# Altium PCB Widora-NEO-SEER.PcbDoc (part 2 of 2)
Units mil, origin at the board's own origin, x right, y up, seen from the top; angles counter-clockwise.
Board outline 3000 x 1400 mil, 4 copper layers (Top Layer, GND, PWR, Bottom Layer), stack 84.8 mil thick; 153 components, 144 nets, 699 pads, 452 vias.
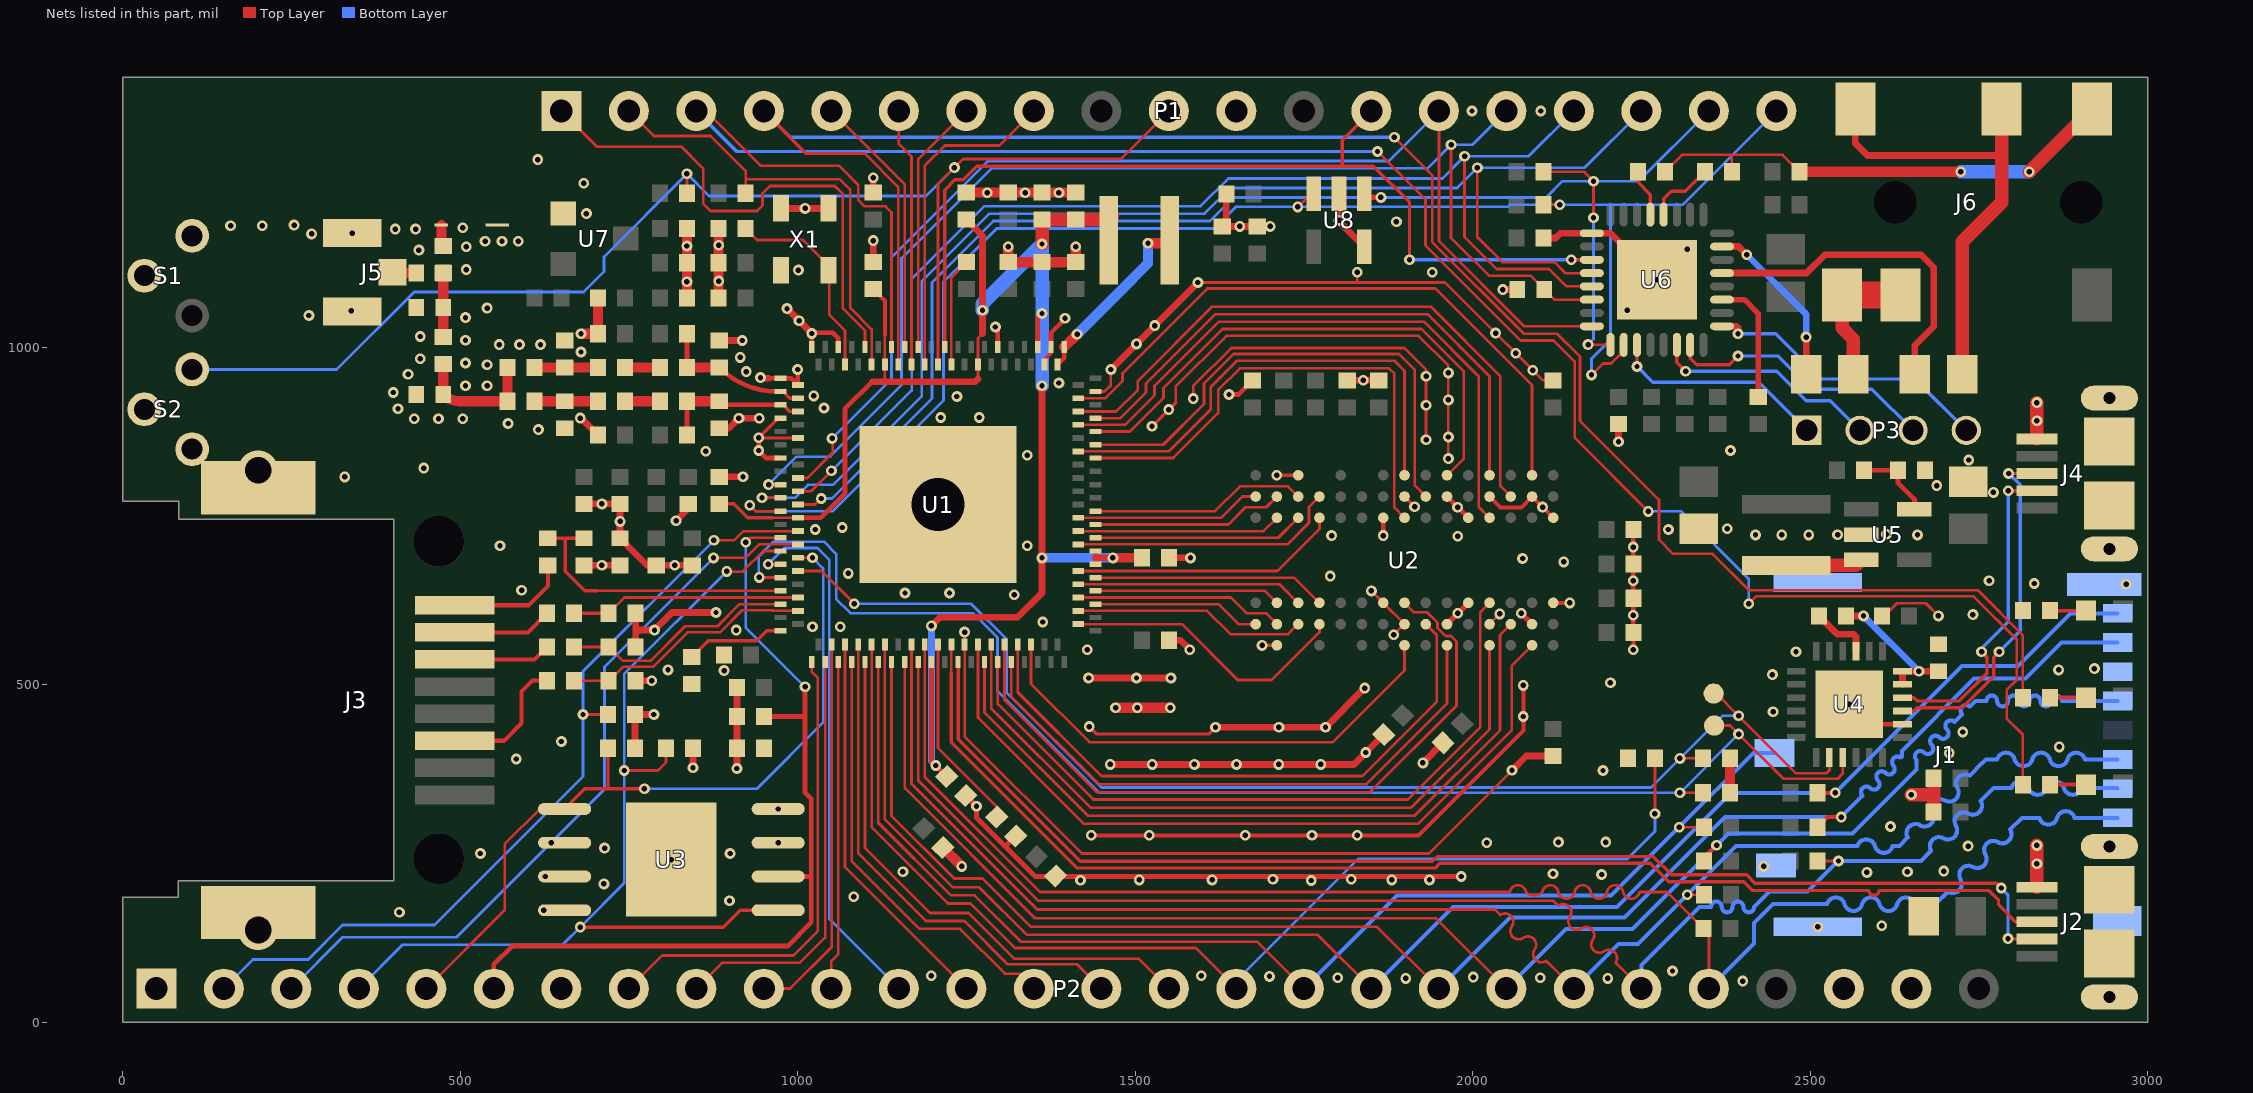
[diagram p4: the nets of this part, all layers, seen from the top]

## Via types
v1: diameter 16, hole 8, Top Layer to Bottom Layer, tented both sides, 447 vias
v2: diameter 59.06, hole 39.37, Top Layer to Bottom Layer, 2 vias
v3: diameter 118.11, hole 78.74, Top Layer to Bottom Layer, tented both sides, 2 vias
v4: diameter 98.43, hole 78.74, Top Layer to Bottom Layer, tented both sides, 1 vias

## Nets (pads, with @x,y where several pads share a name; then routed paths per layer and width w, separated by ;. In a path a pad name is that pad's centre, name@x,y a point inside that pad or via, vN(x,y) a via of type N, cw(c..) or ccw(c..) an arc to the next point about the centre after c; other vN are vias at no path point) (continued)
GND: A1.2 C1.2 C2.2 C3.1 C4.2 C5.2 C8.2 C10.1 C11.2 C12.2 C13.2 C14.1 C15.1 C16.2 C17.2 C18.2 C19.2 C20.2 C21.2 C23.2 C25.2 C26.2 C27.2 C28.2 C29.2 C31.2 C32.2 C33.2 C34.2 C35.2 C36.2 C37.2 C38.1 C39.2 C40.1 C41.1 C42.2 C43.2 C44.2 C45.2 C46.2 C47.2 C48.2 C49.1 C54.2 C55.2 C56.2 C57.2 C58.2 C59.2 C60.1 C61.1 C62.2 C63.2 C64.1 C65.2 C66.1 C69.1 C75.2 J1.6 J1.G1 J1.G2 J1.G3 J1.G4 J1.G5 J2.5 J2.6 J2.7 J2.8 J2.9 J3.9 J3.10 J4.5 J4.6 J4.7 J4.8 J4.9 J5.2 J5.3 L1.1 P1.11 P2.7 P2.26 P2.27 R3.1 R8.1 R10.1 R22.2 R26.2 R30.1 R34.1 R35.1 R37.1 R39.1 R41.2 S1.0 S1.2 S2.0 S2.1 U1.1 U1.2 U1.7 U1.10 U1.13 U1.63 U1.115 U1.120 U1.121 U1.128 U1.152 U1.156 U1.157 U2.A3 U2.A7 U2.B2 U2.B8 U2.D2 U2.D8 U2.E3 U2.E7 U2.F2 U2.F8 U2.H2 U2.H8 U2.J3 U2.J7 U2.N1 U2.P9 U3.4 U4.2 U4.25 U5.2 U6.9 U6.33 U7.1 U8.2 U8.5 X1.2 X1.3 X1.4 | length 9302.3
  Top Layer w4: v1@942.43,865.9 942.88,865.45 U1.10@1000.32,865.45 ; v1(1247.37,578) 1247.37,423.63 1421,250 1935,250 v1(2058.27,373.27) ; U1.115@1441.27,934.35 1454.62,934.35 1464,943.72 v1(1464,966.98) ; 1560,918 1560,942 1635,1017 1920,1017 1964,973 v1(1964,922) v1(1964,835) ; v1(1586,924) 1586,942.46 1642.54,999 1899,999 1931,967 v1(1931,863) ; v1(1592.92,1095.9) 1829,1095.9 ; v1(1829,1111) 1829,1095.9 ; v1(1850,639.06) 1867.5,621.55 U2.J7@1867.5,621.35 U2.H8@1899,589.86 v1@1881.48,572.34 ; U2.D8@2024.98,589.86 v1@2040.09,604.96 ; C29.2@2119,951 2104,951 v1(2063.82,991.18) v1(2034.01,1020.99) 1959.1,1095.9 1829,1095.9 ; C64.1@2606.37,602 2609.76,602 2628.56,620.8 2671.2,620.8 v1(2690,602)
  Top Layer w5: v1@942.43,866.19 U1.7@971.21,894.97 ; U1.121@1365.48,974.7 1365.48,981.48 1375.32,991.32 U1.120@1375.32,1000.29 ; v1(1432,438) 1443,427 1609,427 v1(1619,437) ; v1(1525,883) 1560,918 ; v1(1688,558.31) U2.P9@1710.02,558.36 ; v1@1709.78,810.33 U2.N1@1741.52,810.33 ; U2.H2@1899,778.83 U2.H2@1899,778.83 v1(1914,763.78)
  Top Layer w6: v1(1435,277) v1(1829,277) 1920,277 2075,432 v1(2075,453) v1(2075,499) ; U2.D2@2024.98,778.83 2040.96,762.81 2072,762.81 U2.B2@2087.98,778.83 U2.A3@2119.47,747.34 ; U2.A7@2119.47,621.35 v1(2143.7,621.35) ; v1(2238,552) C39.2@2238,577.43
  Top Layer w7: v1@942.43,866.19 v1(942.43,847) 953.51,835.92 U1.13@974.73,835.92 ; 956.97,954.03 990.48,954.03 U1.2@1000.32,944.19 1000.32,966.68 v1(1000,967) ; U1.7@971.21,894.97 U1.7@974.73,894.98 ; v1@1019.76,1021.66 1052.36,1021.66 1060.36,1013.66 U1.152@1060.36,1000.29 ; U1.156@1020.99,1000.29 v1(1020.99,1020.43) ; v1(1293,1030) 1296.58,1026.42 U1.128@1296.58,1000.29 ; U1.120@1375.32,1000.29 1375.32,1021.32 v1@1397,1043 ; v1(1639,930) 1653,930 C37.2@1674,951 ; v1(1867.5,721) U2.J3@1867.5,747.34 ; U2.F2@1961.99,778.83 U2.E3@1993.49,747.34 ; C39.2@2238,577.43 v1(2238,603) C34.2@2238,628.14 C27.2@2238,678.86 ; C27.2@2238,689.57 C27.2@2238,678.86 ; C28.2@2238,730 v1(2238,704) C27.2@2238,678.86 ; v1(2558,471) 2587.53,441.47 U4.2@2636.74,441.47
  Top Layer w8: C58.2@1247.14,337.86 v1(1265,320) 1265,303 1352,216 v1(1983,216) ; 1308.83,261.55 R22.2@1323.14,275.86 ; U2.F8@1961.99,589.86 U2.E7@1993.49,621.35 ; v1(2071.95,605.89) U2.B8@2087.98,589.86
  Top Layer w10: v1(678,895) 679.02,895 C2.2@704,870.02 ; v1(710,768.02) C19.2@683.5,768.02 C17.2@737,768.02 C49.1@737,717.02 777,677.02 C1.2@790.5,677.02 C55.2@844,677.02 ; v1(820,743) 838,761 C18.2@838,768.02 ; v1(845,377) R35.1@845,406 ; C4.2@878,1068.02 C4.2@883,1073.02 ; C60.1@884,808.02 v1(919.02,808.02) ; C8.2@884,880 898.03,880 v1(913,894.97) v1(943,894.97) ; C10.1@884,1010 v1(918,1010) ; v1(945,955) 945.97,954.03 956.97,954.03 ; X1.3@975.07,1205.69 X1.2@1045.93,1205.69 ; v1(984.19,1057.23) 1019.76,1021.66 v1(1020.99,1020.43) ; C61.1@1112,1126.02 v1(1112,1158) ; C56.2@1112,1229.02 v1(1112,1251) ; v1(1431,510) v1(1502,510) v1(1553,510) ; v1(1463,382) v1(1525.4,382) v1(1587.8,382) v1(1650.2,382) v1(1712.6,382) v1(1775,382) 1824,382 C25.2@1868.22,426.22 ; v1(1464,966.98) v1(1592.92,1095.9) ; C36.2@1550,566 1567,566 v1(1581,552) ; C59.2@1550,688 v1(1582,688) ; v1(1619,437) v1(1782,437) v1(1840,495) ; C54.2@1635,1179 v1(1655,1179) C32.2@1680.98,1179 v1(1699.98,1179) ; C54.2@1635,1185.02 C35.2@1635,1227 ; U8.2@1802,1227.37 1802,1186.03 U8.5@1839.4,1148.63 ; R3.1@1811,951.02 C31.2@1861,951.02 ; v1(1926.28,384.28) C23.2@1956.2,414.2 ; v1(2044.53,1085.47) R34.1@2066,1085.47 ; v1(2058.27,373.27) 2079.36,394.36 C26.2@2119,394.36 ; C69.1@2105,1162 2123,1162 2129.9,1168.9 U6.9@2176.54,1168.9 2204.1,1168.9 v1(2273,1100) ; v1(2216,860) R30.1@2216,886
  Top Layer w15: v1(679,1020) C3.1@704,1020.02 C16.2@704,1073.02 ; C11.2@836,1073.02 v1(836,1097) C21.2@836,1125.02 C20.2@836,1176.02 ; C4.2@883,1073.02 C5.2@883,1125.02 C15.1@883,1176.02 ; C43.2@1215.14,258.86 v1(1243,231) ; C75.2@1249.98,1229.02 C62.2@1312,1229.02 C57.2@1362,1229.02 C40.1@1412,1229 ; v1(1312,1149) C33.2@1312,1126.02 C41.1@1362,1126.02 C48.2@1412,1126.02 v1(1412,1149) ; v1(1471,466) v1(1503,466) v1(1552,466) ; R8.1@2381,340 R39.1@2381,391
  Top Layer w20: v1(2650,337) 2682,337 ; C44.2@2683,311.68 C45.2@2683,361.68 ; J2.5@2835.91,200.19 v1(2835.91,262.09) ; J4.5@2835.91,864.19 v1(2835.91,918.09)
  other v1: 2400,61 1901,65 2200,65 1800,66 2100,66 2001,67 1699,68 1198,69 1598,69 2296,76 2511.5,141.34 2606,143 410,163 624,166 899,180 1083,186 713,205 1418.97,210.5 1761,210 1506,211 1614,211 1880,211 1936,211 1704,212 1820,212 2191,219 2119,220 2584,222 1156,223 2644,223 2698,224 2431,231 2835.91,235 813,241 530,250 900,250 714,258 2734,261 2021,266 2127,267 2197,267 1521,277 1663,277 1762,277 2619,290 2193,373 583,390 2706,399 1841.74,399.74 2869,408 650,416 2726,430 1713,437 2445,460 2204,503 2444,515 891,521 808,522 2868,522 2921,524 2479,549 1429,552 1883,574.06 909,581 1022,586 1063,586 1363,593 2741,604 2040,605.06 1978,606.06 1321,633.22 1159,636 1225,636 591,640 2968,649 2832,650 2238,654 2765,654 1789,661.06 1075,665 818,677.02 2135,682 2074,687 559,706 1340,706 1978,720 1791,721 2419,722 2458,722 2498,722 2540.63,722.37 2659,722 2613.03,723 1026,730 2290,730 2377,731 1066,733 737,742 1977.74,763.09 2103.54,763.22 2771.43,785 2687.4,795 329,808 1709.72,810.28 446,821 2735,833 1340,840 864,846 2382,847 942.43,866 1964,867 616,878 571,887 2835.91,891 432,894 468,894 504,894 1212,896 1269,896 1549.67,907.67 408,909 1039,910 1931,914 1236,927 1024,928 401,933 508,943 540,943 1387,947 1838,951.02 1931,957 423,960 1964,962 924,964 2089,966 540,974 508,976.67 441,983 915,985 679,993 558,1004 588,1004 619,1004 1502,1005 508,1010.33 441,1016 1529.1,1032.08 1002.14,1039.28 1396,1043 508,1044 276.02,1047.02 339,1054 2229,1055 540,1058 883,1098 1940,1111 1001.07,1114.35 509,1115 439,1144 2318,1145 509,1149 836,1150 883,1151 537,1157 562,1157 586,1157 280.02,1167.98 340,1169.07 403.98,1174.98 434,1175 504,1177 160,1180 207,1180 254,1181 1887,1186 1802,1188 687,1198 1011,1205.69 1281,1229.02 1337,1229.02 1387,1229.02 683,1243 615,1278 1999,1350 2101,1350
  other v2: 200.79,136.73 200.79,817.84
  other v4: 1208,767.02
GPIO14: P2.8 U1.40 | length 717.7
  Top Layer w4: P2.8@750,50 799,99 994,99 1030,135 1030,509.99 1020.99,519 U1.40@1020.99,533.76
GPIO15: P2.9 U1.42 | length 630.1
  Top Layer w4: P2.9@850,50 888,88 1003,88 1040.68,125.68 U1.42@1040.68,533.76
GPIO16: P2.10 U1.43 | length 573.8
  Top Layer w4: P2.10@950,50 989,50 1050.52,111.52 U1.43@1050.52,559.35
GPIO17: P2.11 U1.44 | length 488
  Top Layer w4: P2.11@1050,50 1050,91 1060.36,101.36 U1.44@1060.36,533.76
GPIO39: P1.8 U1.139 | length 489.7
  Top Layer w4: U1.139@1188.32,974.7 1188.31,1269.31 1218,1299 1299,1299 P1.8@1350,1350
GPIO40: P1.7 U1.140 | length 379.3
  Top Layer w4: U1.140@1178.47,1000.29 1178.47,1264.47 1178.47,1278.47 P1.7@1250,1350
GPIO41: P1.6 U1.141 | length 383
  Top Layer w4: P1.6@1150,1350 1150,1301 1168.63,1282.37 1168.63,1268.63 U1.141@1168.63,974.7
GPIO42: P1.5 U1.142 | length 394.8
  Top Layer w4: P1.5@1050,1350 1158.79,1241.21 U1.142@1158.79,1000.29
GPIO_0: P2.12 U1.29 | length 804
  Top Layer w4: v1(956.32,678.51) 974.66,678.51 U1.29@974.73,678.44
  Bottom Layer w4: v1(956.32,678.51) 980.34,702.53 1029.47,702.53 1047,685 1047,153 P2.12@1150,50
I2C_SCLK: P1.18 R9.1 U1.20 U6.17 U8.1 | length 2077.1
  Top Layer w4: U1.20@1000.32,767.02 1026.02,767.02 v1(1035,776) ; R9.1@2105,1260 2165,1260 v1(2179,1246) v1(2179,1192) ; v1(2171,1004) 2171.46,1003.54 U6.17@2204.1,1003.54
  Top Layer w8: U8.1@1839.4,1227.37 1844.77,1222 v1(1864,1222)
  Bottom Layer w4: v1(1035,776) 1051,776 1199,924 1199,1096 1290,1187 1611,1187 1646,1222 v1(1864,1222) 2109,1222 2133,1246 2246,1246 P1.18@2350,1350 ; v1(2171,1004) 2179,1012 v1(2179,1192)
I2C_SD: P1.19 R11.1 U1.21 U6.18 U8.3 | length 2320.3
  Top Layer w4: v1(929,766) 937.82,757.18 U1.21@974.73,757.18 ; v1(1741,1208) 1760.37,1227.37 U8.3@1764.6,1227.37 ; R11.1@2105,1211 v1(2129,1211) ; v1(2176,959) 2192.98,975.98 2205.19,975.98 2223.79,994.58 U6.18@2223.79,1003.54
  Bottom Layer w4: v1(929,766) 937.82,757.18 1052.18,757.18 1216,921 1216,1097 1295,1176 1617,1176 1649,1208 v1(1741,1208) 2052,1208 2055,1211 v1(2129,1211) 2204.1,1211 ; v1(2176,959) 2176,983 2204.1,1011.1 2204.1,1211 ; 2211,1211 2204.1,1211 ; P1.19@2450,1350 2311,1211 2204.1,1211
I2S_CLK: P1.17 U1.19 U6.12 | length 1961.9
  Top Layer w4: v1@947.17,776.86 U1.19@974.73,776.87 ; v1(2007,1266) 2007,1163 2044,1126 2121,1126 2137.16,1109.84 U6.12@2176.54,1109.84
  Bottom Layer w4: v1(947.17,776.98) 996.26,776.98 1015.39,796.1 1052.1,796.1 1184,928 1184,1098 1284,1198 1603,1198 1641,1236 1977,1236 v1(2007,1266) 2166,1266 P1.17@2250,1350
I2S_SDI: P1.14 U1.16 U6.16 | length 1765.5
  Top Layer w4: U1.16@1000.32,806.39 1014.39,806.39 1052,844 1052,864 v1(1051,865) ; P1.14@1950,1350 1950,1157.37 2076.27,1031.1 U6.16@2176.54,1031.1
  Bottom Layer w4: v1(1051,865) 1139,953 1139,1133 1282,1276 1876,1276 P1.14@1950,1350
I2S_SDO: P1.15 R34.2 U1.17 U6.14 | length 1840
  Top Layer w4: v1(957,796.55) U1.17@974.73,796.55 ; v1(1968,1300) 1968,1162 2024,1106 2085.47,1106 R34.2@2106,1085.47 2121,1070.47 U6.14@2176.54,1070.47
  Bottom Layer w4: v1(957,796.55) 998.45,838 1048,838 1154,944 1154,1131.69 1287.31,1265 1933,1265 v1(1968,1300) 2000,1300 2018.5,1318.5 ; 2014.5,1314.5 2018.5,1318.5 ; P1.15@2050,1350 2018.5,1318.5
I2S_WS: P1.16 U1.18 U6.13 | length 1818.1
  Top Layer w4: U1.18@1000.32,786.71 1019.71,786.71 v1(1050,817) ; v1(1988,1283) 1988,1163.53 2035.53,1116 2113,1116 2138.84,1090.16 U6.13@2176.54,1090.16
  Bottom Layer w4: v1(1050,817) 1169,936 1169,1101 1277,1209 1597,1209 1638,1250 1955,1250 v1(1988,1283) 2083,1283 P1.16@2150,1350
LINK0: P1.4 R31.2 U1.143 | length 2940.7
  Top Layer w4: 1013,1287 1099.63,1287 1148.94,1237.69 U1.143@1148.94,974.7 ; v1(1884,1311) 1940,1255 1940,1156.06 2076.06,1020 2125,1020 2159,986 2159,891 2276,774 2276,715 2297,694 2355.31,694 2409.31,640 2748.31,640 2815,573.31 R31.2@2815,480.95
  Top Layer w5: P1.4@950,1350 1013,1287
  Bottom Layer w5: P1.4@950,1350 989,1311 1827,1311 ; 1832,1311 1827,1311 ; v1(1884,1311) 1827,1311
LN: P3.3 U6.23 | length 405
  Top Layer w5: U6.23@2322.21,1003.54 2322.21,983.79 2332,974 2380,974 v1(2393,987)
  Bottom Layer w5: v1(2393,987) 2453,987 2502,938 2591.48,938 P3.3@2652.48,877
LOUT: C70.1 J6.4 J6.5 | length 216
  Top Layer w10: J6.5@2542,1073.2 J6.5@2547.24,1073.2
  Top Layer w20: J6.5@2547.24,1077.2 2547.24,1073.2 2547.24,1028.76 2564,1012 C70.1@2564,960
  Top Layer w40: J6.5@2547.24,1077.2 J6.4@2633.86,1077.2
LP: P3.4 U6.25 | length 430.9
  Top Layer w10: U6.25@2369.46,1031.1 2390.9,1031.1 2393,1029 v1(2393,1020)
  Bottom Layer w5: v1(2393,1020) 2449,1020 2516,953 2655.22,953 P3.4@2731.22,877
MADDR0: U1.80 U2.M8 | length 432.9
  Top Layer w4: U1.80@1415.68,589.86 1569.14,589.86 1652,507 1702,507 1773.02,578.02 U2.M8@1773.02,589.86
MADDR1: U1.88 U2.M3 | length 399.5
  Top Layer w4: U1.88@1415.68,668.6 1710.59,668.59 1773.02,731.02 U2.M3@1773.02,747.34
MADDR2: U1.87 U2.M7 | length 347.2
  Top Layer w4: U1.87@1441.27,658.76 1735.62,658.75 U2.M7@1773.02,621.35
MADDR3: U1.97 U2.N2 | length 321.8
  Top Layer w4: U1.97@1441.27,757.18 1618.18,757.18 1655,794 1726.35,794 U2.N2@1741.52,778.83
MADDR4: U1.82 U2.N8 | length 346.3
  Top Layer w4: U1.82@1415.68,609.54 1606.46,609.54 1641,575 1726.66,575 U2.N8@1741.52,589.86
MADDR5: U1.93 U2.N3 | length 312.5
  Top Layer w4: U1.93@1441.27,717.81 1599.19,717.81 1711.99,717.81 U2.N3@1741.52,747.34
MADDR6: U1.86 U2.N7 | length 337.3
  Top Layer w4: U1.86@1415.68,648.91 1713.96,648.91 U2.N7@1741.52,621.35
MADDR7: U1.95 U2.P2 | length 285.9
  Top Layer w4: U1.95@1441.27,737.5 1638,737.49 1663.51,763 1694.19,763 U2.P2@1710.02,778.83
MADDR8: U1.84 U2.P8 | length 310.7
  Top Layer w4: U1.84@1415.68,629.23 1641.77,629.23 1665,606 1693.88,606 U2.P8@1710.02,589.86
MADDR9: U1.94 U2.P3 | length 309.2
  Top Layer w4: U1.94@1415.68,727.65 1576,727.65 ; 1582.65,727.65 1576,727.65 ; U2.P3@1710.02,747.34 1690.34,727.65 1576,727.65
MADDR10: U1.92 U2.M2 | length 400.4
  Top Layer w4: U1.92@1415.68,707.97 1725.47,707.96 1757.49,739.99 1757.49,763.31 U2.M2@1773.02,778.83
MADDR11: U1.85 U2.P7 | length 276.1
  Top Layer w4: U1.85@1441.27,639.07 1692.3,639.07 U2.P7@1710.02,621.35
MADDR12: U1.96 U2.R2 | length 275.9
  Top Layer w4: U1.96@1415.68,747.34 1452.65,747.34 1627.33,747.33 1658.83,778.83 U2.R2@1678.53,778.83
MADDR13: U1.83 U2.R8 | length 249.5
  Top Layer w4: U1.83@1441.27,619.39 1623.62,619.38 1653.14,589.86 U2.R8@1678.53,589.86
MDATA0: U1.71 U2.G8 | length 909.8
  Top Layer w4: U1.71@1326.11,559.35 1326.11,488.89 1450,365 1836.72,365 1947,475.28 1947,573.35 U2.G8@1930.5,589.86
MDATA1: U1.107 U2.G2 | length 750.5
  Top Layer w4: U1.107@1441.27,855.61 1541.6,855.6 1602,916 1602,946 1646,990 1891,990 1914.4,966.6 1914.4,794.93 U2.G2@1930.5,778.83
MDATA2: U1.69 U2.H7 | length 1061.4
  Top Layer w4: U1.69@1306.43,559.35 1306.43,477.57 1443,341 1848,341 1975.97,468.97 1975.97,564.15 1967.78,572.34 1959.75,572.34 1948.02,584.07 1948.02,592.1 1932.74,607.38 1912.97,607.38 U2.H7@1899,621.35
MDATA3: U1.105 U2.H3 | length 740.9
  Top Layer w4: U1.105@1441.27,835.92 1556.24,835.92 1623,902.69 1623,936.63 1655.21,968.83 1876.28,968.83 1884,961.12 1884,762.34 U2.H3@1899,747.34
MDATA4: U1.106 U2.H1 | length 719.1
  Top Layer w4: U1.106@1415.68,845.76 1549.76,845.76 1612,908 1612,941 1651,980 1884,980 1899,965 U2.H1@1899,810.33
MDATA5: U1.73 U2.H9 | length 728.4
  Top Layer w4: U1.73@1345.8,559.35 1345.8,501.2 1432.1,414.9 1792.9,414.9 1899,521 U2.H9@1899,558.36
MDATA6: U1.109 U2.F1 | length 807.3
  Top Layer w4: U1.109@1441.27,875.29 1492.29,875.29 1542,925 1542,939.77 1629.23,1027 1924,1027 1987,964 1987,835.34 U2.F1@1961.99,810.33
MDATA7: U1.70 U2.F9 | length 886.3
  Top Layer w4: U1.70@1316.27,533.76 1316.27,482.73 1446.2,352.8 1842.8,352.8 1961.99,471.99 U2.F9@1961.99,558.36
MDATA8: U1.66 U2.C8 | length 1118
  Top Layer w4: U1.66@1276.9,533.76 1276.9,459.1 1430,306 1914,306 2040.38,432.38 2040.38,573.76 U2.C8@2056.48,589.86
MDATA9: U1.112 U2.C2 | length 924.5
  Top Layer w4: U1.112@1415.68,904.82 1471.82,904.82 1504,937 1504,950 1614,1060 1938,1060 2041,957 2041,794.32 U2.C2@2056.48,778.83
MDATA10: U1.68 U2.D7 | length 1069.8
  Top Layer w4: U1.68@1296.58,533.76 1296.58,471.42 1438,330 1904,330 2011.01,437.01 2011.01,607.38 U2.D7@2024.98,621.35
MDATA11: U1.110 U2.D3 | length 914.7
  Top Layer w4: U1.110@1415.68,885.13 1485.13,885.13 1528.8,928.8 1528.8,942.8 1624,1038 1928,1038 2009,957 2009,763.32 U2.D3@2024.98,747.34
MDATA12: U1.111 U2.D1 | length 839.9
  Top Layer w4: U1.111@1441.27,894.98 1477.97,894.97 1516.1,933.1 1516.1,946.1 1619,1049 1933,1049 2024.98,957.02 U2.D1@2024.98,810.33
MDATA13: U1.67 U2.D9 | length 1065.7
  Top Layer w4: U1.67@1286.74,559.35 1286.74,465.26 1434,318 1909,318 2024.98,433.98 2024.98,543.31 U2.D9@2024.98,558.36
MDATA14: U1.114 U2.B1 | length 939.3
  Top Layer w4: U1.114@1415.68,924.5 1456.09,924.5 1481.29,949.7 1481.29,961.29 1607,1087 1945,1087 2087.98,944.02 U2.B1@2087.98,810.33
MDATA15: U1.65 U2.B9 | length 1159.5
  Top Layer w4: U1.65@1267.06,559.35 1267.06,451.27 1424.33,294 1919,294 2058,433 2058,528.39 U2.B9@2087.98,558.36
MICIN: C68.2 C72.2 J6.1 R7.2 | length 716.5
  Top Layer w4: C68.2@2285,1260 2310,1285 2384,1285 ; C72.2@2384,1260 2384,1285 ; R7.2@2484,1260 2459,1285 2384,1285
  Top Layer w15: R7.2@2484,1260 v1(2723,1260)
  Top Layer w20: v1(2824.53,1260) J6.1@2917.32,1352.8
  Bottom Layer w20: v1(2723,1260) v1(2824.53,1260)
NetC6_1: C6.1 L3.1 | length 52
  Top Layer w15: C6.1@744,920.02 L3.1@796,920.02
NetC6_2: C6.2 C7.2 L1.2 | length 98.7
  Top Layer w15: C7.2@610,920 L1.2@655,920 ; L1.2@650.32,920.02 C6.2@704,920.02
NetC7_1: C7.1 C12.1 L4.2 L6.1 | length 219.5
  Top Layer w15: L4.2@475,975 C12.1@475,930 ; L6.1@570,970 C7.1@570,920 499.14,920 ; C12.1@475,930 ccw(c499.14,954.14) 499.14,920 ; C12.1@475,930 ccw(c499.14,954.14) 499.14,920
NetC8_1: C8.1 L2.1 L3.2 U1.5 U1.6 | length 216.9
  Top Layer w5: U1.5@978.39,914.66 988.23,904.82 U1.6@1000.32,904.82
  Top Layer w7: L2.1@836,870.02 L3.2@836,920.02 ; C8.1@884,920 889.34,914.66 U1.5@974.73,914.66
  Top Layer w15: L3.2@836.06,920 C8.1@884,920
NetC9_1: C9.1 L5.1 | length 52
  Top Layer w15: C9.1@744,970.02 L5.1@796,970.02
NetC9_2: C9.2 C14.2 L6.2 | length 98.7
  Top Layer w15: L6.2@610,970 C14.2@655,970 ; C14.2@650.32,970.02 C9.2@704,970.02
NetC10_2: C10.2 L5.2 L7.2 U1.3 U1.4 | length 227.9
  Top Layer w5: U1.3@978.4,934.34 988.24,924.5 U1.4@1000.32,924.5
  Top Layer w7: L5.2@836,970.02 L7.2@836,1020.02 ; C10.2@884,970 ccw(c970.08,1056.08) 970.08,934.34 U1.3@974.73,934.35 U1.3@978.4,934.34
  Top Layer w15: L5.2@836,970.02 C10.2@884,970
NetC13_1: C13.1 L4.1 R24.1 R40.1 | length 95
  Top Layer w15: L4.1@475,1015 R40.1@475,1110
NetC15_2: C15.2 U1.151 X1.1 | length 301.7
  Top Layer w4: C15.2@923,1176.02 940.02,1159 1007.93,1159 1045.93,1121 X1.1@1045.93,1114.35 ; X1.1@1046.93,1114.35 1046.93,1048.07 1070.2,1024.8 U1.151@1070.2,974.7
NetC63_1: C63.1 R4.1 U4.5 U4.6 | length 215
  Top Layer w10: R4.1@2553,602 v1(2579,602) ; U4.5@2636.74,500.53 U4.6@2636.74,520.21 2689.79,520.21 C63.1@2690,520
  Bottom Layer w10: v1(2579,602) v1(2661,520)
NetC68_1: C68.1 U6.5 | length 71.1
  Top Layer w5: C68.1@2245,1260 2245,1244.16 2263.16,1226 U6.5@2263.16,1196.46
NetC70_2: C70.2 U6.31 | length 255.1
  Top Layer w10: U6.31@2369.46,1149.21 2393.79,1149.21 v1(2406,1137) ; C70.2@2494,960 v1(2494,1015)
  Bottom Layer w10: v1(2406,1137) 2494,1049 v1(2494,1015)
NetC71_2: C71.2 U6.29 | length 502.3
  Top Layer w10: U6.29@2369.46,1109.84 2494.84,1109.84 2522,1137 2664,1137 2683,1118 2683,1031 2655,1003 C71.2@2655,960
NetC72_1: C72.1 U6.4 | length 101.2
  Top Layer w5: U6.4@2282.84,1196.46 2282.84,1219.84 2294,1231 2315,1231 C72.1@2344,1260
NetC74_2: C74.2 U6.27 | length 186
  Top Layer w8: U6.27@2369.46,1070.47 2402.53,1070.47 2423,1050 C74.2@2423,926
NetDS1_K: DS1.K R13.1 | length 53.5
  Top Layer w6: R13.1@2855,352 DS1.K@2908.5,352
NetDS2_K: DS2.K R31.1 | length 53.5
  Top Layer w6: R31.1@2855,480.95 DS2.K@2908.5,480.95
NetDS3_K: DS3.K R41.1 | length 53.5
  Top Layer w5: R41.1@2855,609.91 DS3.K@2908.5,609.91
NetJ5_1: J5.1 R24.2 | length 34
  Top Layer w15: J5.1@401.04,1110 R24.2@435,1110
NetL8_2: L8.2 U1.118 U1.119 | length 314.8
  Top Layer w7: U1.119@1385.17,974.7 1395.01,984.54 U1.118@1395.01,1000.29
  Top Layer w15: U1.118@1395.01,1000.29 v1(1414,1019.28) ; v1(1519,1154) L8.2@1546.78,1154
  Bottom Layer w15: v1(1414,1019.28) 1460.86,1066.14 ; 1497.86,1103.14 1460.86,1066.14 ; v1(1519,1154) 1519,1124.28 1460.86,1066.14
NetL9_2: L9.2 U5.3 | length 114.5
  Top Layer w20: L9.2@2464.5,676.72 2567.39,676.72 U5.3@2575.63,684.96
NetR4_2: R4.2 U4.9 | length 89
  Top Layer w10: R4.2@2513,602 2540,575 2564,575 2567.84,571.16 U4.9@2567.84,549.74
NetR5_1: R5.1 R10.2 U5.5 | length 118.3
  Top Layer w7: R5.1@2580,818 R10.2@2630,818 2630,799.47 2654.37,775.1 U5.5@2654.37,759.77
NetR22_1: R22.1 U1.59 | length 291.2
  Top Layer w4: U1.59@1208,559.35 1208,406.27 1294.86,319.41 R22.1@1294.86,304.14
NetR26_1: R26.1 U1.39 | length 147.9
  Top Layer w5: R26.1@843,541 867.3,565.3 939.3,565.3 954.01,580.01 U1.39@974.73,580.02
NETREF: C49.2 R25.2 R27.2 R28.2 R29.2 | length 244.2
  Top Layer w10: R29.2@683.5,677.02 v1(710,677.02) 724,677.02 ; R25.2@760,506.02 v1(783.98,506.02) ; R27.2@760,556.02 760,581.02 ; R28.2@760,606.02 760,581.02 ; v1(879,607) 814,607 v1(788.02,581.02) 760,581.02
PERST_N: R33.2 U1.135 | length 160.6
  Top Layer w4: U1.135@1227.68,974.7 1227.69,1103.71 R33.2@1250,1126.02
PWM_CH0: P2.13 U1.45 | length 583.8
  Top Layer w4: U1.45@1070.2,559.35 1070.2,522.37 1070.2,229.8 P2.13@1250,50
PWM_CH1: P2.14 U1.46 | length 643
  Top Layer w4: U1.46@1080.05,533.76 1080.05,238.95 1180.5,138.5 1240.5,138.5 1307,72 1328,72 P2.14@1350,50
REF_CLK: P1.13 U1.136 U6.11 | length 1412.8
  Top Layer w5: U1.136@1217.84,1000.29 1217.84,1232.84 1233,1248 1245,1248 1265,1268 1807,1268 ; P1.13@1850,1350 1807,1307 1807,1268 ; v1(1906.47,1129.53) 1906.47,1214.53 1853,1268 1807,1268 ; v1(2146,1129.53) U6.11@2176.54,1129.53
  Bottom Layer w5: v1(1906.47,1129.53) v1(2146,1129.53)
RN: P3.1 U6.19 | length 322.7
  Top Layer w5: v1(2243.47,971.47) U6.19@2243.47,1003.54
  Bottom Layer w5: v1(2243.47,971.47) 2266.94,948 2424,948 P3.1@2495,877
ROUT: C71.1 J6.3 J6.6 | length 691.8
  Top Layer w10: J6.6@2566.93,1352.8 2566.93,1302.07 2585,1284 2783.46,1284
  Top Layer w20: C71.1@2725,960 2725,1156 2783.46,1214.46 2783.46,1284 J6.3@2783.46,1352.8
RP: P3.2 U6.22 | length 338.9
  Top Layer w5: U6.22@2302.53,1003.54 2302.53,977.48 v1(2315.5,964.5)
  Bottom Layer w5: v1(2315.5,964.5) 2450.5,964.5 2494,921 2529.74,921 P3.2@2573.74,877
RX+: C52.2 J3.3 | length 126.7
  Top Layer w6: J3.3@510,537.52 610.5,537.52 C52.2@629,556.02
RX-: C53.2 J3.6 | length 183.4
  Top Layer w6: J3.6@510,417.05 565.05,417.05 591,443 591,490 607.02,506.02 C53.2@629,506.02
RXD2/PWM3: P2.16 U1.48 | length 812
  Top Layer w4: U1.48@1099.73,533.76 1099.73,258.27 1196,162 1253,162 1321,94 1506,94 P2.16@1550,50
RXI_N: C51.1 R28.1 U1.34 | length 362.4
  Top Layer w4: R28.1@720,606.02 743.2,629.22 813,629.22 879,629.22 ; 857.5,629.22 879,629.22 ; U1.34@1000.32,629.23 879,629.22
  Top Layer w5: C51.1@669,606.02 R28.1@720,606.02
RXI_P: C50.1 R29.1 U1.33 | length 433.2
  Top Layer w4: 702.95,639.07 U1.33@974.73,639.07
  Top Layer w5: C50.1@630,717.02 656,717.02 ; R29.1@683.5,717.02 656,717.02 ; 702.95,639.07 684.93,639.07 656,668 656,717.02
SD_CD: J1.G6 P2.18 R21.2 U1.50 | length 1863.5
  Top Layer w4: U1.50@1119.42,533.76 1119.42,295.58 1227,188 1262,188 1330.51,119.49 1566,119.49 ; 1580.51,119.49 1566,119.49 ; P2.18@1750,50 1680.51,119.49 1566,119.49 ; v1(2306,289) R21.2@2343,289
  Bottom Layer w6: P2.18@1750,50 1888,188 2205,188 v1(2306,289) 2416.21,399.21 J1.G6@2446.89,399.21
SD_CLK: J1.5 P2.21 R17.2 U1.54 | length 2439.8
  Top Layer w4: U1.54@1158.79,533.76 1158.79,347.21 1352,154 1946,154 P2.21@2050,50
  Top Layer w6: R17.2@2343,239 2343,244 v1(2361.41,262.41)
  Bottom Layer w6: P2.21@2050,50 2138,138 2237,138 2379,280 2563,280 2657.34,374.34 2657.34,388.34 cw(c2663,394) 2668.66,399.66 ccw(c2674.31,405.31) 2679.97,410.97 cw(c2685.63,416.63) 2691.28,422.28 ccw(c2696.94,427.94) 2702.6,433.6 cw(c2708.25,439.25) 2713.91,444.91 2725.22,456.22 cw(c2730.88,461.88) 2736.54,467.54 2744.98,475.98 2760.98,475.98 cw(c2768.98,475.98) 2776.98,475.98 ccw(c2784.98,475.98) 2792.98,475.98 cw(c2800.98,475.98) 2808.98,475.98 ccw(c2816.98,475.98) 2824.98,475.98 cw(c2832.98,475.98) 2840.98,475.98 ccw(c2848.98,475.98) 2856.98,475.98 cw(c2864.98,475.39) 2872.98,475.98 J1.5@2955.59,475.98
SD_CMD: J1.3 P2.22 R18.2 U1.55 | length 2435.1
  Top Layer w4: U1.55@1168.63,559.35 1168.63,353.37 1355,167 2033,167 2040.99,159.01 cw(c2047.92,148.97) 2057.96,142.04 ccw(c2068,135.11) 2074.93,125.07 cw(c2081.86,115.03) 2091.9,108.1 ccw(c2101.94,101.17) 2108.87,91.13 2117.5,82.5 P2.22@2150,50 ; v1(2318,189) R18.2@2343,189
  Bottom Layer w6: P2.22@2150,50 2216,116 2245,116 v1(2318,189) 2390,261 2570,261 cw(c2583,257.55) 2596,261 ccw(c2609,264.45) 2622,261 2632,261 2644.5,273.5 cw(c2656.13,280.25) 2662.88,291.88 ccw(c2669.63,303.51) 2681.27,310.27 cw(c2692.9,317.02) 2699.65,328.65 ccw(c2706.4,340.28) 2718.04,347.04 cw(c2729.67,353.79) 2736.42,365.42 2754.81,383.81 2755,384 2760.37,389.37 2777,389.37 cw(c2790,385.92) 2803,389.37 ccw(c2816,392.82) 2829,389.37 cw(c2842,385.92) 2855,389.37 ccw(c2868,392.82) 2881,389.37 cw(c2894,385.92) 2907,389.37 2910,389.37 J1.3@2955.59,389.37
SD_D0: J1.7 P2.20 R16.2 U1.52 | length 2457.2
  Top Layer w4: U1.52@1139.1,533.76 1139.1,305.9 1232,213 1274,213 1345.51,141.49 1753,141.49 ; 1758.51,141.49 1753,141.49 ; P2.20@1950,50 1858.51,141.49 1753,141.49
  Top Layer w6: R16.2@2511,289 2526,304 v1(2546,304)
  Bottom Layer w6: P2.20@1950,50 2055,155 2225,155 2374,304 v1(2546,304) 2577.62,335.62 cw(c2583.28,341.28) 2588.94,346.94 ccw(c2594.59,352.59) 2600.25,358.25 cw(c2605.91,363.91) 2611.56,369.56 ccw(c2617.22,375.22) 2622.88,380.88 cw(c2629.58,385.49) 2634.19,392.19 2636,394 2636,402 2743,509 2819,509 2872.6,562.6 J1.7@2955.59,562.6
SD_D1: J1.8 P2.19 R15.2 U1.51 | length 2456.6
  Top Layer w4: U1.51@1129.26,559.35 1129.26,300.74 1230,200 1269,200 1339.51,129.49 1659,129.49 ; 1670.51,129.49 1659,129.49 ; P2.19@1850,50 1770.51,129.49 1659,129.49
  Top Layer w6: R15.2@2511,340 v1(2537,340)
  Bottom Layer w6: P2.19@1850,50 1971,171 2214,171 2383,340 v1(2537,340) 2724.8,527.8 2807.8,527.8 2885.91,605.91 J1.8@2955.59,605.91
SD_D2: J1.1 P2.24 R20.2 U1.57 | length 2445.9
  Top Layer w4: U1.57@1188.32,559.35 1188.31,363.69 1359,193 2055,193 cw(c2067,190.8) 2079,193 ccw(c2091,204.89) 2103,193 cw(c2115,190.8) 2127,193 ccw(c2139,195.2) 2151,193 cw(c2163,190.8) 2175,193 ccw(c2187,195.2) 2199,193 cw(c2211,190.8) 2223,193 ccw(c2235,195.2) 2247,193 2252,193 2287.95,193 R20.2@2341.95,139 2350,130.95 P2.24@2350,50
  Bottom Layer w6: P2.24@2350,50 2417,117 2417,147 2445,175 2525,175 cw(c2538,171.55) 2551,175 ccw(c2564,178.45) 2577,175 cw(c2590,171.55) 2603,175 ccw(c2616,178.45) 2629,175 cw(c2642,171.55) 2655,175 2681,175 2686,175 2704.38,193.38 ccw(c2711.14,205.02) 2722.77,211.77 cw(c2734.4,218.52) 2741.15,230.15 ccw(c2747.91,241.79) 2759.54,248.54 cw(c2771.17,255.29) 2777.92,266.92 ccw(c2784.68,278.56) 2796.31,285.31 2813.76,302.76 2839.76,302.76 ccw(c2852.76,306.21) 2865.76,302.76 cw(c2878.76,299.31) 2891.76,302.76 2915,302.76 J1.1@2955.59,302.76
SD_D3: J1.2 P2.23 R19.2 U1.56 | length 2415.3
  Top Layer w4: U1.56@1178.47,533.76 1178.47,358.53 1357,180 2120,180 2126.94,173.06 cw(c2133.87,163.02) 2143.91,156.09 ccw(c2153.95,149.16) 2160.88,139.12 cw(c2167.81,129.08) 2177.85,122.15 ccw(c2187.89,115.22) 2194.82,105.18 cw(c2201.75,95.14) 2211.79,88.21 2217.5,82.5 P2.23@2250,50 ; R19.2@2511,239 v1(2542,239)
  Bottom Layer w4: v1@2541,239 v1(2542,239)
  Bottom Layer w6: P2.23@2250,50 2250,85 2336,171 2353,171 cw(c2361,171) 2369,171 ccw(c2377,171) 2385,171 cw(c2393,171) 2401,171 ccw(c2409,171) 2417,171 2440,194 2496,194 v1@2541,239 ; v1(2542,239) 2664,239 2679.12,254.12 cw(c2690.75,260.87) 2697.5,272.5 ccw(c2704.26,284.14) 2715.89,290.89 cw(c2727.52,297.64) 2734.27,309.27 ccw(c2741.03,320.91) 2752.66,327.66 2771.04,346.04 2772,347 2798,347 cw(c2811,343.55) 2824,347 ccw(c2837,350.45) 2850,347 cw(c2863,343.55) 2876,347 ccw(c2889,350.45) 2902,347 2908,347 2954.65,347 J1.2@2955.59,346.06
SD_WP: P2.17 R37.2 U1.49 | length 1740.9
  Top Layer w4: U1.49@1109.57,559.35 1109.57,289.43 1223,176 1256,176 1322,110 1590,110 P2.17@1650,50 ; v1(2270,309) R37.2@2270,391
  Bottom Layer w4: P2.17@1650,50 1650,61.66 1830.34,242 2229,242 2270,283 v1(2270,309)
SOC_1.2VD: C40.2 C57.1 C58.1 C59.1 C60.2 C61.2 C75.1 L8.1 U1.22 U1.58 U1.89 U1.91 U1.122 U1.131 U1.145 | length 2573.3
  Top Layer w4: 962.78,747.34 U1.22@1000.32,747.34 ; 1129.26,949.23 1129.26,1018.9 ; 1267.06,953 U1.131@1267.06,974.7 ; U1.131@1267.16,974.8 U1.131@1267.06,974.7 ; 1273.8,1020.27 1267.06,1013.53 U1.131@1267.06,974.7 ; 1361,635 1362,636
  Top Layer w5: C60.2@884,768.02 905.31,768.02 926,747.34 962.78,747.34
  Top Layer w6: C61.2@1112,1086.02 1129.16,1068.86 1129.16,1019 ; U1.89@1441.27,678.44 U1.91@1441.27,698.13
  Top Layer w7: U1.22@1000.32,747.34 1034.33,747.33 1070,783 1070,908.57 1110.41,948.97 ; U1.58@1198.16,533.76 1198.16,386.84 v1(1204.59,380.41) C58.1@1218.86,366.14 ; U1.122@1355.64,1000.29 1355.64,1043.64 v1(1362,1050)
  Top Layer w10: 1110.41,948.97 1263.03,948.97 1267.06,953 ; v1(1198.16,587.16) 1211,600 1326,600 1361,635 ; C75.1@1249.98,1189.02 1273.8,1165.21 v1(1273.8,1054.8) 1273.8,1020.27 ; 1362,636 v1(1362,688) v1(1362,943) ; 1441.27,688 v1(1467,688)
  Top Layer w14: v1(1467,688) C59.1@1510,688
  Top Layer w20: v1(1362,1153) C57.1@1362,1189.02 1461,1189.02 L8.1@1466,1194.02
  Bottom Layer w10: v1(1198.16,587.16) 1198.16,386.84 v1(1204.59,380.41)
  Bottom Layer w14: v1(1362,688) v1(1467,688)
  Bottom Layer w20: v1(1273.8,1054.8) 1273.8,1064.8 v1(1362,1153) 1362,1125 ; v1(1362,943) v1(1362,1050) 1362,1125 ; v1@1362,1146.02 1362,1125
SPI_CLK: P2.6 R36.2 U1.25 U3.6 | length 1298.4
  Top Layer w4: v1(923,711) 929.81,717.81 U1.25@974.73,717.81
  Top Layer w7: P2.6@550,50 550,86 577,113 985,113 1020.06,148.06 1020.06,331 1011.06,340 1011.06,453 ; R36.2@950,453 1011.06,453 ; U3.6@971.19,216 1019.06,216 ; v1(1011.06,496.94) 1011.06,453
  Bottom Layer w4: v1(923,711) 923,585 v1(1011.06,496.94)
SPI_CS0: P2.5 R6.2 U1.28 U3.1 | length 1143.1
  Top Layer w4: P2.5@450,50 566,166 566,264 618,316 U3.1@654.81,316 ; 719,346 R6.2@719,406 R6.2@719,408 ; U1.28@1000.32,688.28 v1(1022,688.28)
  Top Layer w5: U3.1@654.81,316 684.81,346 v1(773,346)
  Bottom Layer w4: v1(773,346) 940,346 1037.89,443.89 1037.89,672.4 v1(1022,688.28)
SPI_CS1: P2.2 R38.2 U1.24 | length 1259.4
  Top Layer w4: v1(682,456) R38.2@719,456 ; v1(876,714) 906,714 919.65,727.65 U1.24@1000.32,727.65
  Bottom Layer w4: P2.2@150,50 193,93 275,93 326,144 462,144 682,364 v1(682,456) 682,520 v1(876,714)
SPI_MISO: P2.3 U1.26 U3.2 | length 1149.2
  Top Layer w4: v1(634.81,266) U3.2@654.81,266 ; v1(875.34,688) 923.04,688 943,707.96 U1.26@1000.32,707.97
  Bottom Layer w4: P2.3@250,50 326,126 494.81,126 v1(634.81,266) 714,345.19 714,526.66 v1(875.34,688)
SPI_MOSI: P2.4 R35.2 U1.27 U3.5 | length 1466.6
  Top Layer w4: v1(743,373) 793,373 805,385 R35.2@805,406 ; v1(895,668) 895.37,667.63 918.63,667.63 949.12,698.12 U1.27@974.73,698.13
  Top Layer w5: v1(678,141) 890,141 915,166 U3.5@971.19,166
  Bottom Layer w4: P2.4@350,50 415,115 652,115 v1(678,141) 743,206 v1(743,373) 743,516 v1(895,668)
TX+: C50.2 J3.1 | length 180.6
  Top Layer w6: J3.1@492.13,617.84 601.84,617.84 630,646 C50.2@630,677.02
TX-: C51.2 J3.2 | length 130.7
  Top Layer w6: J3.2@510,577.68 600.65,577.68 C51.2@629,606.02
TXD2/PWM2: P2.15 U1.47 | length 752.2
  Top Layer w4: U1.47@1089.89,559.35 1089.89,250.11 1190,150 1247,150 1311,86 1414,86 P2.15@1450,50
TXO_N: C53.1 R25.1 U1.36 | length 373.9
  Top Layer w4: C53.1@669,506.02 R25.1@720,506.02 ; R25.1@721,506.02 741.5,526.52 785.5,526.52 836.68,577.7 884.95,577.7 917.63,610.38 962.5,610.38 963.34,609.54 U1.36@1000.32,609.54
TXO_P: C52.1 R27.1 U1.35 | length 348
  Top Layer w4: C52.1@669,556.02 R27.1@720,556.02 ; R27.1@721,556.02 741.5,535.52 770,535.52 781.77,535.52 832.95,586.7 881.22,586.7 913.9,619.38 U1.35@974.73,619.39
U_N: J4.2 U4.4 | length 476.7
  Top Layer w5: U4.4@2636.74,480.84 2653.68,480.84 2658.53,476 2715,476 2720.92,476 2761.92,517 2761.92,541.08 v1(2754,549) ; v1(2793.42,787.42) J4.2@2835.91,787.42
  Bottom Layer w5: v1(2754,549) 2754,554 2793.42,593.42 v1(2793.42,787.42)
U_P: J4.3 U4.3 | length 521.8
  Top Layer w5: U4.3@2636.74,461.16 2653.68,461.16 2658.53,466 2719.14,466 2725.06,466 2771.92,512.86 2771.92,540.92 v1(2779.84,548.84) ; v1(2794,813) J4.3@2835.91,813.01
  Bottom Layer w5: v1(2779.84,548.84) 2810.92,579.92 2810.92,796.08 v1(2794,813)
UART_RXD0: R8.2 RX0.1 U1.31 U4.21 | length 2083.7
  Top Layer w4: v1(943,659) 974.49,659 U1.31@974.73,658.76 ; v1(2307,340) R8.2@2341,340 ; RX0.1@2357.64,439.64 2381.36,439.64 v1(2394,427) 2460.2,360.8 2540.8,360.8 2548.16,368.16 U4.21@2548.16,392.26
  Bottom Layer w4: v1(943,659) 942.42,659.58 942.42,690.42 964,712 1039,712 1057,694 1057,627.34 1078.34,606 1259.83,606 1296,569.83 1296,491 1447,340 v1(2307,340) v1(2394,427)
UART_RXD1: P1.1 U1.148 | length 779.9
  Top Layer w4: P1.1@650,1350 703,1297 828,1297 860,1265 860,1213 871,1202 940,1202 948,1210 948,1228 959,1239 1055,1239 1067,1227 1067,1057.69 1099.73,1024.96 U1.148@1099.73,1000.29
UART_TXD0: R39.2 TX0.1 U1.30 U4.20 | length 1891.8
  Top Layer w4: U1.30@1000.32,668.6 1035.41,668.59 v1(1084,620) ; v1(2307,391) R39.2@2341,391 ; TX0.1@2357,487 2361,487 v1(2394,454) 2479.2,368.8 2523.8,368.8 2528.47,373.47 U4.20@2528.47,392.26
  Bottom Layer w4: v1(1084,620) 1257,620 1309.35,567.65 1309.35,488.82 1450.27,347.9 2263.9,347.9 v1(2307,391) 2370,454 v1(2394,454)
UART_TXD1: P1.2 R32.2 U1.147 | length 673.9
  Top Layer w4: P1.2@750,1350 787,1313 871,1313 923,1261 R32.2@923,1228 ; 925,1249 1062,1249 1078.1,1232.9 1078.1,1057.9 1109.57,1026.43 U1.147@1109.57,974.7
UD_N: J2.2 U1.62 | length 1879.3
  Top Layer w5: U1.62@1237.53,533.76 1237.69,533.59 1237.69,419.15 1418.36,238.48 1940.34,238.48 1947.43,245.57 2267.43,245.57 2294.7,218.3 2405.7,218.3 2418,206 2776,206 v1(2783,199) ; v1(2793,124) 2793.58,123.42 J2.2@2835.91,123.42
  Bottom Layer w5: v1(2783,199) 2793,189 v1(2793,124)
UD_P: J2.3 U1.61 | length 1881
  Top Layer w4: U1.61@1227.38,559.65 U1.61@1227.68,559.35 1227.69,518
  Top Layer w5: 1227.69,518 1227.69,415.01 1414.21,228.48 1944.48,228.48 1951.57,235.57 1997.74,235.57 2057.74,235.57 2062.12,235.57 2147.74,235.57 2187,235.57 2263.29,235.57 2290.56,208.3 2401.56,208.3 2414.68,195.18 2572,195.18 2587,195.18 ccw(c2594.5,195.55) 2602,195.18 2764.9,195.18 2779,181.08 2779,174 2803.99,149.01 J2.3@2835.91,149.01
VDD_FLASH: C38.2 D1.K P2.1 R6.1 R36.1 R38.1 U3.3 U3.7 U3.8 | length 198
  Top Layer w10: R6.1@759,408 R38.1@759,456 v1(787,456) ; v1@910,374 C38.2@910,406 R36.1@910,453 D1.K@910,496
  other v1: 625.81,216 971.19,266 971.19,316 910,376
WIFI: A1.1 R40.2 | length 28.3
  Top Layer w15: R40.2@472.32,1152.68 A1.1@472.32,1181.02
WLED_N: P1.3 R13.2 U1.144 | length 3212.1
  Top Layer w4: P1.3@850,1350 864,1350 945,1269 1061,1269 1090,1240 1090,1217.93 1099.22,1208.71 1130.29,1208.71 1139.1,1199.9 U1.144@1139.1,1000.29 ; v1(1859,1290) 1930,1219 1930,1151 2071,1010 2120,1010 2151,979 2151,866 v1(2260.1,756.9) ; v1(2409,620) 2420,631 2742,631 2806,567 2806,507 2791,492 2791,450 2815,426 R13.2@2815,352
  Bottom Layer w4: v1(2260.1,756.9) 2309.1,756.9 2409,657 v1(2409,620)
  Bottom Layer w5: P1.3@850,1350 910,1290 v1(1859,1290)
WPS_RST_PBC: P1.10 R14.1 S2.2 U1.137 | length 1976.3
  Top Layer w4: R14.1@836,1228 v1(836,1257) ; U1.137@1208,974.7 1208,1242 v1(1232.2,1266.2) 1245,1279 1479,1279 P1.10@1550,1350
  Bottom Layer w4: S2.2@103,967.11 317.11,967.11 432,1082 683,1082 713,1112 713,1134 v1(836,1257) 869,1224 1190,1224 v1(1232.2,1266.2)
pads on no net: J2.4 J3. J3.4 J3.5 J3.7 J3.8 J4.4 J6. U1.9 U1.11 U1.12 U1.37 U1.126 U1.127 U1.129 U1.130 U1.132 U1.133 U1.153 U2.A2 U2.A8 U2.E2 U2.E8 U2.R3 U2.R7 U4.1 U4.10 U4.11 U4.12 U4.13 U4.14 U4.15 U4.16 U4.17 U4.18 U4.19 U4.22 U4.23 U4.24 U6.2 U6.3 U6.6 U6.7 U6.15 U6.30
copper on no net:
  other v1: 2790,840
  other v3: 2326,626 530,827

## Polygon pours and split planes (outlines as drawn)
GND on Top Layer "Bottom Layer-No Net" (solid, remove dead copper, pour order 0): -2.47,1402.53 2997.53,1402.53 2997.53,2.53 -2.47,2.53
GND on Bottom Layer "Bottom Layer-No Net" (solid, remove dead copper, pour order 2): -1.09,1402 2998.91,1402 2998.91,2 -1.09,2
AGND on GND (split plane): 2979.9,1015.55 2558,1015.55 2557.02,1015.36 2556.2,1014.8 2414.94,873.55 2201.55,873.55 2201.55,980.94 2398.8,1178.2 2399.36,1179.02 2399.55,1180 2399.55,1379.9 2979.9,1379.9
GND on GND (split plane): 2394.45,1181.06 2197.2,983.8 2196.64,982.98 2196.45,982 2196.45,871 2196.64,870.02 2197.2,869.2 2198.02,868.64 2199,868.45 2416,868.45 2416.98,868.64 2417.8,869.2 2559.06,1010.45 2979.9,1010.45 2979.9,20.1 20.1,20.1 20.1,164.9 82.68,164.9 86.6,165.29 90.37,166.43 93.84,168.29 96.89,170.79 99.39,173.83 101.24,177.31 102.39,181.08 102.77,185 102.77,189.47 401.57,189.47 405.5,189.86 409.27,191 412.74,192.86 415.79,195.36 418.28,198.4 420.14,201.88 421.29,205.65 421.67,209.57 421.67,745 421.29,748.92 420.14,752.69 418.28,756.17 415.79,759.21 412.74,761.71 409.27,763.57 405.5,764.71 401.57,765.1 103.1,765.1 103.1,772 102.71,775.92 101.57,779.69 99.71,783.17 97.21,786.21 94.17,788.71 90.69,790.57 86.92,791.71 83,792.1 20.1,792.1 20.1,1197.64 592,1197.64 592,1379.9 2394.45,1379.9
A3.3V on PWR (split plane): 2979.9,1015.55 2558,1015.55 2557.02,1015.36 2556.2,1014.8 2452.94,911.55 2276.55,911.55 2276.55,1055.94 2398.8,1178.2 2399.36,1179.02 2399.55,1180 2399.55,1379.9 2979.9,1379.9
DDR_VREF on PWR (split plane): 1862.45,852.55 1623.29,852.55 1622.31,852.36 1621.49,851.8 1574.23,804.55 1370.55,804.55 1370.55,842.45 1572.12,842.45 1573.09,842.64 1573.92,843.2 1657.17,926.45 1862.45,926.45
5V on PWR (split plane): 2979.9,20.1 2780.55,20.1 2780.55,715 2780.55,789 2780.55,791 2780.55,860 2780.55,1010.45 2979.9,1010.45
DDR_IO_1V8 on PWR (split plane): 2215.45,767.94 2215.45,318.55 1312.55,318.55 1312.55,939 1312.55,979.45 2003.94,979.45
3.3V_RF on PWR (split plane): 1097.45,945.9 943.1,791.55 768,791.55 767.02,791.36 766.2,790.8 765.64,789.98 765.45,789 765.45,771 765.45,760.55 414.16,760.55 412.74,761.71 409.27,763.57 405.5,764.71 401.57,765.1 103.1,765.1 103.1,772 102.71,775.92 101.57,779.69 99.71,783.17 97.21,786.21 94.17,788.71 90.69,790.57 86.92,791.71 83,792.1 20.1,792.1 20.1,1197.64 592,1197.64 592,1379.9 1097.45,1379.9
NETREF on PWR (split plane): 765.45,645 765.64,644.02 766.2,643.2 767.02,642.64 768,642.45 983.45,642.45 983.45,490.55 659,490.55 658.02,490.36 657.2,489.8 567.94,400.55 421.67,400.55 421.67,745 421.29,748.92 420.14,752.69 418.67,755.45 765.45,755.45
3.3VD on PWR (split plane): 2394.45,1181.06 2272.2,1058.8 2271.64,1057.98 2271.45,1057 2271.45,909 2271.64,908.02 2272.2,907.2 2273.02,906.64 2274,906.45 2454,906.45 2454.98,906.64 2455.8,907.2 2559.06,1010.45 2775.45,1010.45 2775.45,860 2775.45,791 2775.45,789 2775.45,715 2775.45,20.1 988.55,20.1 988.55,488 988.55,645 988.36,645.98 987.8,646.8 986.98,647.36 986,647.55 770.55,647.55 770.55,786.45 944.16,786.45 945.13,786.64 945.96,787.2 1101.8,943.04 1102.36,943.87 1102.55,944.84 1102.55,1379.9 2394.45,1379.9
VDD_FLASH on PWR (split plane): 983.45,20.1 20.1,20.1 20.1,164.9 82.68,164.9 86.6,165.29 90.37,166.43 93.84,168.29 96.89,170.79 99.39,173.83 101.24,177.31 102.39,181.08 102.77,185 102.77,189.47 401.57,189.47 405.5,189.86 409.27,191 412.74,192.86 415.79,195.36 418.28,198.4 420.14,201.88 421.29,205.65 421.67,209.57 421.67,395.45 569,395.45 569.98,395.64 570.8,396.2 660.06,485.45 983.45,485.45

## Keep-outs
Keep-Out Layer:
  lines w3.94: 82.68,209.57 401.57,209.57 401.57,745 83,745
  lines w4: 82.68,209.57 82.68,185 0,185 0,0 3000,0 3000,1400 0,1400 0,1044.52 0,772 83,772 83,745

## Other copper
Top Layer:
  rectangle net GND: 520,1167 589,1197
  pour cut-out: 592.72,1197.74 593,1198.02 593,1400 0,1400 0,1197.02
  pour cut-out: 2198,1398 3002,1398 3002,1030 2197.78,1030 2197.73,1029.95
Bottom Layer:
  pour cut-out: 593.36,1198.36 593.64,1198.64 593,1412 0.64,1412 0.64,1197.64
  pour cut-out: 2197,1398 3001,1398 3001,1030 2196.78,1030 2196.73,1029.95
GND (plane layer: these items are gaps in the copper):
  rectangle: 0.64,1197.64 592,1400
  lines w5: 951,1255 951,1089 967,1073 1014,1073 1062,1025 1062,959 ; 2397,1400 2397,1180 2199,982 2199,871 2253,871 2416,871 2558,1013 3002.01,1013 3002.01,1163
  lines w6: 0,0 0,185 82.68,185 82.68,209.57 401.57,209.57 401.57,745 83,745 83,772 0,772 0,1400 3000,1400 3000,0 0,0
PWR (plane layer: these items are gaps in the copper):
  rectangle: 0.64,1197.64 592,1400
  lines w5: 385,745 388,748 399,748 409,758 767.25,758 768,758.75 768,771 ; 399.59,398 569,398 659,488 986,488 ; 403,741 410,748 ; 986,0 986,488 ; 1100,1400 1100,944.84 944.16,789 768,789 768,645 986,645 986,488 ; 2397,1400.09 2397,1180 2274,1057 2274,909 2454,909 2558,1013 2999,1013 ; 2778,0 2778,715 2778,789 2778,791 2778,860 2778,1013 ; 1310,316 1310,939 1310,982 2005,982 2218,769 2218,316 1310,316 ; 1368,802 1575.29,802 1623.29,850 1865,850 1865,929 1656.12,929 1572.12,845 1398,845 1368,845 1368,802
  lines w6: 0,0 3000,0 3000,1400 0,1400 0,772 83,772 83,745 401.57,745 401.57,209.57 82.68,209.57 82.68,185 0,185 0,0

## Silkscreen, mask and mechanical layers (free items; w line width, h text height)
Top Overlay:
  drawing of 720 lines, arcs and shapes, not listed
  text "RST" at 146,1080.45 h70
  text "USB-TTL" at 2794.9,958 h50
  text "WPS" at 146,882.45 h70
  text "PWR" at 2889.18,638 h50
  text "LAN" at 2900.94,509 h50
  text "WIFI" at 2901.04,380 h50
  text "seer" at 1973,296 h80
  text "USB HOST" at 2772.13,290 h50
  text "What will you make?" at 1533,130 h70
Bottom Overlay:
  drawing of 678 lines, arcs and shapes, not listed
  text "RXD1" at 670,1293 h60 r90
  text "TXD1" at 770,1293 h60 r90
  text "WLED" at 870,1293 h60 r90
  text "LINK0" at 970,1293 h60 r90
  text "IO42" at 1070,1293 h60 r90
  text "IO41" at 1170,1293 h60 r90
  text "IO40" at 1270,1293 h60 r90
  text "IO39" at 1370,1293 h60 r90
  text "RST" at 1470,1293 h60 r90
  text "WPS" at 1570,1293 h60 r90
  text "GND" at 1670,1293 h60 r90
  text "3V3" at 1770,1293 h60 r90
  text "MCLK" at 1870,1293.12 h60 r90
  text "SDI" at 1970,1293.12 h60 r90
  text "SDO" at 2070,1293.12 h60 r90
  text "LRCK" at 2170,1293 h60 r90
  text "BCLK" at 2270,1293 h60 r90
  text "SCL" at 2370,1293 h60 r90
  text "SDA" at 2470,1293 h60 r90
  text "UART" at 779,1057.23 h60
  text "LED" at 953,1056.88 h60
  text "GPIO" at 1265,1056.91 h60
  text "KEY" at 1560,1056.88 h60
  text "PWR" at 1770,1056.88 h60
  text "I2S" at 2083,1056.91 h60
  text "I2C" at 2443,1057 h60
  text "L" at 2701,957 h60
  text "R" at 2547,954 h60
  text "-" at 2480,902 h50
  text "+" at 2558,902 h50
  text "-" at 2636,902 h50
  text "+" at 2714,902 h50
  text "OUTPUT" at 2725,801 h60
  text "Open Source" at 1994,675.7 h70
  text "hardware" at 1937.48,609.7 h70
  text "IO18" at 1270.23,564.29 h60 r90
  text "IO19" at 1369.88,563.82 h60 r90
  text "IO20" at 1469.88,564.52 h60 r90
  text "IO21" at 1569.88,561.19 h60 r90
  text "Widora-NEO-SEER" at 2115,518.15 h60
  text "BOARD:" at 2362,518.15 h60
  text "DESIGNED BY MANGO" at 2362,448.63 h60
  text "2" at 1470,408.56 h60 r90
  text "3" at 1569.65,407.56 h60 r90
  text "https://widora.io" at 2362,384.74 h60
  text "SPI" at 600,303.68 h60
  text "GPIO" at 1004,303.68 h60
  text "PWM" at 1364,303.65 h60
  text "UART" at 1579,304 h60
  text "SDIO" at 2064,304 h60
  text "RXD2" at 1570,248.39 h60 r90
  text "TXD2" at 1470,238.33 h60 r90
  text "IO17" at 1070,223.82 h60 r90
  text "CMD" at 2170,224.05 h60 r90
  text "IO15" at 870,222.47 h60 r90
  text "IO16" at 970,222.36 h60 r90
  text "GND" at 670,221.48 h60 r90
  text "IO14" at 770,221.48 h60 r90
  text "CLK" at 2070,216.22 h60 r90
  text "CS0" at 470,205.82 h60 r90
  text "CS1" at 170,201.04 h60 r90
  text "IO0" at 1170,192.29 h60 r90
  text "MO" at 370,189.92 h60 r90
  text "WP" at 1670,188.95 h60 r90
  text "CK" at 570,182.29 h60 r90
  text "CD" at 1770,179.36 h60 r90
  text "D0" at 1970,173.98 h60 r90
  text "D2" at 2370,173.92 h60 r90
  text "D3" at 2270,173.39 h60 r90
  text "VF" at 70,170.97 h60 r90
  text "D1" at 1870,170.64 h60 r90
  text "MI" at 270,165.58 h60 r90
  text "0" at 1270,134.14 h60 r90
  text "1" at 1370,127.88 h60 r90
  text "3V3" at 2488,87.93 h50
  text "GND" at 2598,88 h50
  text "GND" at 2699,88 h50
  text "5V" at 2776,88 h50
Top Solder:
  rectangle: 0.64,1197.64 593,1412

## Text inside footprints (layer, text, board x,y; h text height)
C46: Mechanical 15 "1" at 2700,144 h29.53
C65: Mechanical 15 "1" at 2751.71,759.53 h29.53 r90
C66: Mechanical 15 "1" at 2352.71,759.53 h29.53 r90
C67: Mechanical 15 "1" at 2481.71,1103.53 h29.53 r90
C70: Mechanical 15 "1" at 2535.47,977.71 h29.53 r180
C71: Mechanical 15 "1" at 2696.47,977.71 h29.53 r180
J3: Keep-Out Layer "CUT OFF" at 217.13,672.28 h60 r270
M5: Bottom Overlay "94V-0" at 256,1266 h45; Bottom Overlay "R" at 326,1321.5 h25